# Altium PCB mega128PCB.PcbDoc (part 3 of 3)
Units mm, origin at the board's own origin, x right, y up, seen from the top; angles counter-clockwise.
Board outline 152.4 x 101.6 mm, 2 copper layers (Top Layer, Bottom Layer); 70 components, 96 nets, 393 pads, 80 vias.
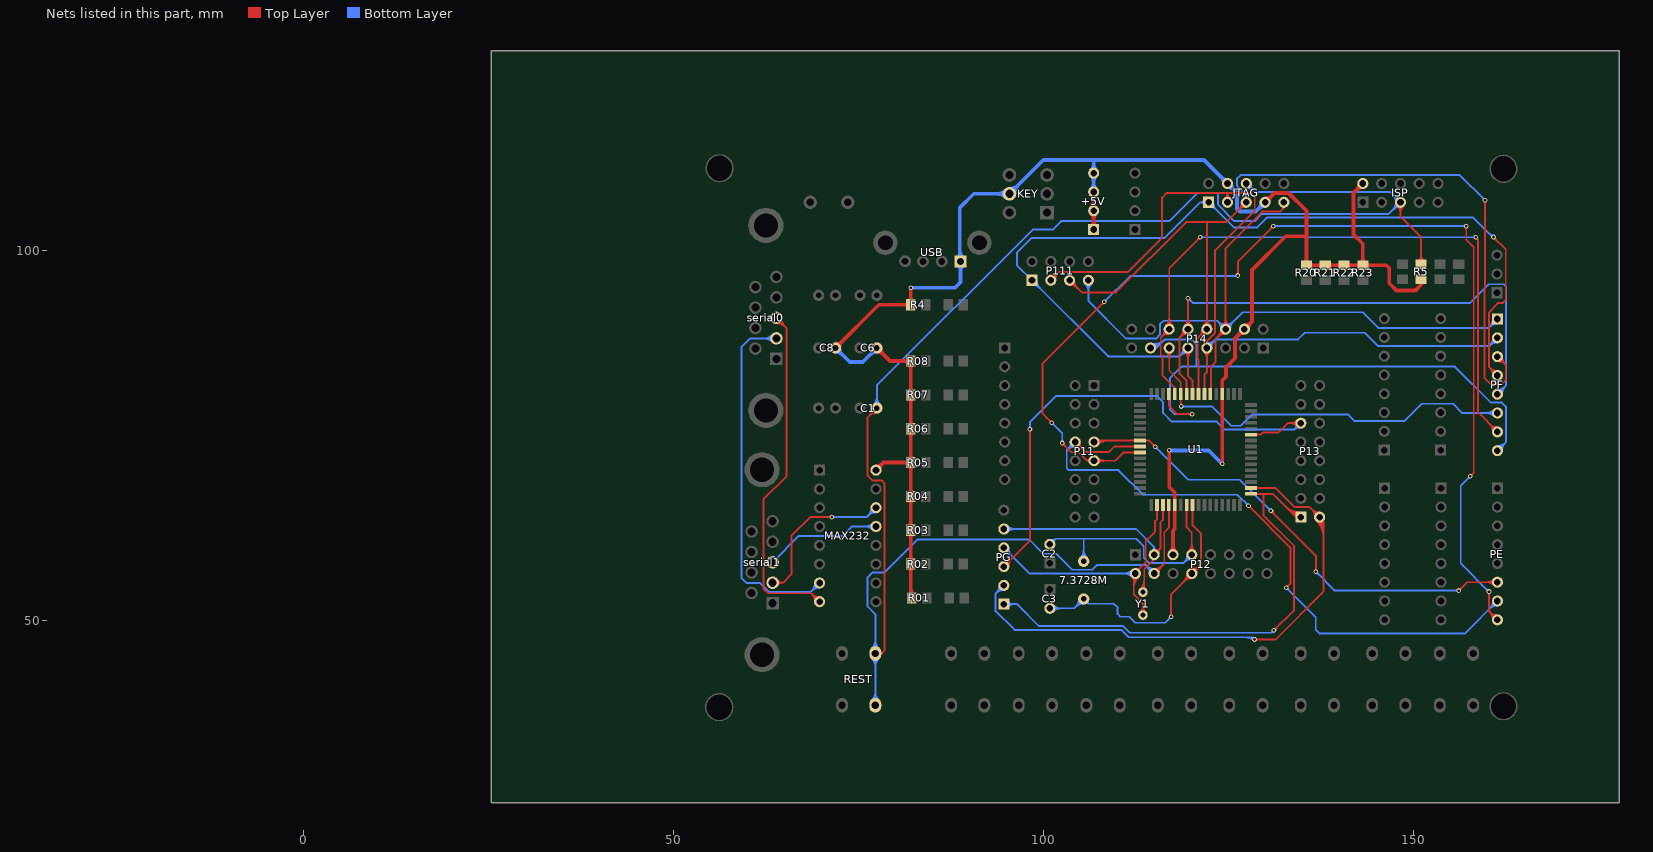
[diagram p3: the nets of this part, all layers, seen from the top]

## Via types
v1: diameter 0.635, hole 0.356, Top Layer to Bottom Layer, 80 vias

## Nets (pads, with @x,y where several pads share a name; then routed paths per layer and width w, separated by ;. In a path a pad name is that pad's centre, name@x,y a point inside that pad or via, vN(x,y) a via of type N, cw(c..) or ccw(c..) an arc to the next point about the centre after c; other vN are vias at no path point) (continued)
PE5: P11.7 PE.6 U1.7 | length 78.8
  Top Layer w0.254: P11.7@106.858,74.168 107.042,74.352 114.294,74.352 v1(115.113,73.533) ; P11.7@107.119,73.907 cw(c108.193,72.833) 108.193,74.352 ; P11.7@107.298,73.727 cw(c108.806,72.22) 108.806,74.352 ; P11.7@107.298,74.609 ccw(c107.918,75.228) 107.918,74.352 ; U1.7@112.437,74.265 ccw(c112.227,74.055) 112.227,74.352 ccw(c112.227,74.649) U1.7@112.437,74.439 ; U1.7@113.711,74.265 cw(c113.921,74.055) 113.921,74.352 cw(c113.921,74.649) U1.7@113.711,74.439 ; v1@114.922,73.533 ccw(c114.462,73.533) 114.788,73.858 ccw(c115.113,74.183) v1@115.113,73.724 ; v1@130.759,64.681 cw(c130.759,64.221) 131.084,64.546 cw(c131.41,64.872) v1@130.95,64.872 ; v1(130.759,64.872) 136.83,58.801 v1(136.83,56.617) ; v1@136.695,56.751 ccw(c136.37,57.077) 136.83,57.077 ccw(c137.29,57.077) v1@136.965,56.751 ; v1(156.14,54.083) 157.271,55.214 PE.6@161.364,55.214 ; v1@156.14,54.274 ccw(c156.14,54.733) 156.465,54.408 ccw(c156.791,54.083) v1@156.331,54.083 ; PE.6@160.923,54.773 ccw(c159.86,53.71) 159.86,55.214 ccw(c159.86,56.718) PE.6@160.923,55.655 ; PE.6@161.103,54.953 ccw(c160.473,54.323) 160.473,55.214 ccw(c160.473,56.105) PE.6@161.103,55.475
  Bottom Layer w0.254: v1@115.113,73.343 cw(c115.113,72.883) 115.438,73.208 cw(c115.763,73.533) v1@115.303,73.533 ; v1(115.113,73.533) 119.558,69.088 119.558,69.063 126.568,69.063 v1(130.759,64.872) ; v1@130.569,64.872 ccw(c130.109,64.872) 130.434,65.197 ccw(c130.759,65.522) v1@130.759,65.062 ; v1@136.83,56.426 cw(c136.83,55.905) 137.198,56.273 ; v1(136.83,56.617) 136.855,56.617 139.389,54.083 v1(156.14,54.083) ; v1@137.02,56.617 ccw(c137.419,56.617) 137.137,56.335 ; v1@156.005,53.948 ccw(c155.68,53.623) 155.68,54.083 ccw(c155.68,54.543) v1@156.005,54.218
PE6: P11.8 PE.7 U1.8 | length 102.5
  Top Layer w0.254: P11.8@104.318,73.545 cw(c104.318,72.041) 105.381,73.104 cw(c106.445,74.168) P11.8@104.941,74.168 ; P11.8@104.318,73.799 cw(c104.318,72.908) 104.948,73.538 cw(c105.578,74.168) P11.8@104.687,74.168 ; P11.8@104.318,74.168 105.664,72.822 108.89,72.822 109.62,73.552 U1.8@113.074,73.552 ; U1.8@112.437,73.465 ccw(c112.227,73.255) 112.227,73.552 ccw(c112.227,73.849) U1.8@112.437,73.639 ; v1@127.737,65.341 cw(c127.737,64.882) 128.062,65.207 cw(c128.387,65.532) v1@127.927,65.532 ; v1(127.737,65.532) 133.389,59.88 133.389,55.03 v1(132.842,54.483) ; v1@132.842,54.673 ccw(c132.842,55.133) 133.167,54.808 ccw(c133.492,54.483) v1@133.032,54.483
  Bottom Layer w0.254: P11.8@103.695,74.168 cw(c102.191,74.168) 103.254,73.104 cw(c104.318,72.041) P11.8@104.318,73.545 ; P11.8@103.949,74.168 cw(c103.058,74.168) 103.688,73.538 cw(c104.318,72.908) P11.8@104.318,73.799 ; P11.8@104.318,74.168 103.175,73.025 103.175,70.612 103.429,70.358 110.16,70.358 113.487,67.031 126.238,67.031 v1(127.737,65.532) ; v1@127.546,65.532 ccw(c127.086,65.532) 127.411,65.857 ccw(c127.737,66.182) v1@127.737,65.722 ; v1@132.842,54.292 cw(c132.842,53.833) 133.167,54.158 cw(c133.492,54.483) v1@133.032,54.483 ; v1(132.842,54.483) 136.819,50.506 136.819,48.779 137.338,48.26 156.95,48.26 PE.7@161.364,52.674 ; PE.7@160.741,52.674 cw(c159.237,52.674) 160.3,51.61 cw(c161.364,50.547) PE.7@161.364,52.051 ; PE.7@160.995,52.674 cw(c160.104,52.674) 160.734,52.044 cw(c161.364,51.414) PE.7@161.364,52.305
PE7: P11.9 PE.8 U1.9 | length 166.5
  Top Layer w0.254: v1@100.952,76.759 ccw(c100.492,76.759) 100.818,77.084 ccw(c101.143,77.409) v1@101.143,76.949 ; v1(101.143,76.759) 99.873,78.029 99.873,84.709 v1(108.255,93.091) ; v1@102.565,73.825 cw(c102.565,73.365) 102.89,73.69 cw(c103.216,74.016) v1@102.756,74.016 ; v1(102.565,74.016) 103.81,72.771 104.814,72.771 105.957,71.628 ; P11.9@106.275,71.408 ccw(c105.957,71.288) 105.957,71.628 ; P11.9@106.275,71.848 cw(c105.957,71.968) 105.957,71.628 ; P11.9@107.119,71.367 cw(c107.749,70.737) 107.749,71.628 cw(c107.749,72.519) P11.9@107.119,71.889 ; P11.9@107.298,71.187 cw(c108.362,70.124) 108.362,71.628 cw(c108.362,73.132) P11.9@107.298,72.069 ; v1@108.064,93.091 cw(c107.604,93.091) 107.93,92.766 cw(c108.255,92.441) v1@108.255,92.9 ; 110.479,72.379 110.479,72.381 ; U1.9@112.437,72.665 ccw(c112.227,72.455) 112.227,72.752 ccw(c112.227,73.049) U1.9@112.437,72.839 ; U1.9@113.074,72.752 110.852,72.752 109.728,71.628 P11.9@106.858,71.628 105.957,71.628 ; v1@126.154,96.782 ccw(c125.737,97.199) 126.327,97.199 ; v1(126.289,96.647) 126.327,96.685 126.327,98.59 v1(131.064,103.327) ; 126.327,97.015 ccw(c126.657,97.015) v1@126.424,96.782 ; v1@130.874,103.327 cw(c130.414,103.327) 130.739,103.002 cw(c131.064,102.677) v1@131.064,103.137 ; v1@157.015,103.192 cw(c156.69,102.867) 157.15,102.867 cw(c157.61,102.867) v1@157.285,103.192 ; v1(157.15,103.327) 157.15,101.498 158.166,100.482 158.166,70.002 v1(157.683,69.52) ; v1@157.683,69.71 ccw(c157.683,70.17) 158.008,69.845 ccw(c158.334,69.52) v1@157.874,69.52 ; v1@160.088,53.815 cw(c159.763,53.49) 160.223,53.49 cw(c160.683,53.49) v1@160.358,53.815 ; v1(160.223,53.95) 160.223,51.275 PE.8@161.364,50.134 ; PE.8@160.741,50.134 ccw(c159.237,50.134) 160.3,51.198 ccw(c161.364,52.261) PE.8@161.364,50.757 ; PE.8@160.995,50.134 ccw(c160.104,50.134) 160.734,50.764 ccw(c161.364,51.394) PE.8@161.364,50.503
  Bottom Layer w0.254: v1@101.143,76.568 cw(c101.143,76.108) 101.468,76.434 cw(c101.793,76.759) v1@101.333,76.759 ; v1(101.143,76.759) 102.565,75.336 v1(102.565,74.016) ; v1@102.43,74.15 ccw(c102.105,74.476) 102.565,74.476 ccw(c103.025,74.476) v1@102.7,74.15 ; v1(108.255,93.091) 111.684,96.52 111.684,96.571 126.213,96.571 v1(126.289,96.647) ; v1@108.255,93.281 ccw(c108.255,93.741) 108.58,93.416 ccw(c108.905,93.091) v1@108.445,93.091 ; 125.645,96.571 ccw(c125.645,97.291) v1@126.154,96.782 ; v1(131.064,103.327) v1(157.15,103.327) ; v1@131.199,103.192 cw(c131.524,102.867) 131.524,103.327 cw(c131.524,103.787) v1@131.199,103.462 ; v1@157.015,103.192 ccw(c156.69,102.867) 156.69,103.327 ccw(c156.69,103.787) v1@157.015,103.462 ; v1@157.493,69.52 cw(c157.033,69.52) 157.358,69.195 cw(c157.683,68.869) v1@157.683,69.329 ; v1(157.683,69.52) 156.413,68.25 156.413,57.76 v1(160.223,53.95) ; v1@160.033,53.95 ccw(c159.573,53.95) 159.898,54.275 ccw(c160.223,54.6) v1@160.223,54.14
PF0: P14.13 PF.8 U1.61 | length 89.7
  Top Layer w0.254: U1.61@116.887,80.015 cw(c116.677,79.805) 116.974,79.805 cw(c117.271,79.805) U1.61@117.061,80.015 ; U1.61@116.974,80.652 116.974,79.063 118.108,77.93 v1(120.117,77.93) ; v1@119.982,77.795 ccw(c119.657,77.47) 119.657,77.93 ccw(c119.657,78.39) v1@119.982,78.064
  Bottom Layer w0.254: P14.13@114.448,86.732 ccw(c114.68,87.793) 115.448,87.025 ; P14.13@114.478,86.868 115.291,86.868 ; P14.13@114.502,86.98 ccw(c114.798,88.332) 115.776,87.354 ; P14.13@114.557,87.228 ccw(c114.916,88.872) 116.105,87.682 ; P14.13@114.611,87.477 ccw(c115.033,89.411) 116.434,88.011 ; P14.13@115.079,86.706 cw(c115.291,86.649) 115.291,86.868 ; P14.13@115.079,87.03 ccw(c115.291,87.087) 115.291,86.868 ; v1@119.982,77.795 ccw(c119.657,77.47) 119.657,77.93 ccw(c119.657,78.39) v1@119.982,78.064 ; v1(120.117,77.93) 117.78,77.93 117.119,78.59 117.119,82.779 118.603,84.262 118.613,84.252 118.714,84.353 155.626,84.353 160.496,79.483 161.976,79.483 162.509,78.95 162.509,74.139 PF.8@161.364,72.994 ; 120.701,84.353 120.701,87.376 120.066,88.011 116.434,88.011 ; PF.8@161.364,73.363 ccw(c161.364,74.254) 161.994,73.624 ccw(c162.624,72.994) PF.8@161.733,72.994 ; PF.8@161.364,73.617 ccw(c161.364,75.121) 162.427,74.058 ccw(c163.491,72.994) PF.8@161.987,72.994 ; 115.291,86.868 116.434,88.011
PF1: P14.12 PF.7 U1.60 | length 103.5
  Top Layer w0.254: P14.12@116.395,89.408 cw(c114.891,89.408) 115.954,88.344 cw(c117.018,87.281) P14.12@117.018,88.785 ; P14.12@116.577,89.849 ccw(c115.514,90.912) 117.018,90.912 ccw(c118.522,90.912) P14.12@117.458,89.849 ; P14.12@116.649,89.408 cw(c115.758,89.408) 116.388,88.778 cw(c117.018,88.148) P14.12@117.018,89.039 ; P14.12@116.757,89.669 ccw(c116.127,90.299) 117.018,90.299 ccw(c117.909,90.299) P14.12@117.279,89.669 ; U1.60@117.689,81.291 ccw(c117.5,81.489) 117.774,81.489 ; U1.60@117.774,80.652 117.774,81.489 ; U1.60@117.859,81.291 cw(c118.048,81.489) 117.774,81.489 ; 120.84,101.485 cw(c121.209,101.117) v1@121.209,101.638 ; 120.902,101.547 ccw(c120.62,101.829) v1@121.018,101.829 ; v1(121.209,101.829) 121.183,101.829 117.018,97.663 P14.12@117.018,89.408 115.875,88.265 115.875,85.979 116.129,85.725 116.129,83.134 117.774,81.489 ; v1@158.42,101.638 cw(c158.42,101.178) 158.745,101.503 cw(c159.07,101.829) v1@158.61,101.829 ; v1(158.42,101.829) 158.75,101.498 158.75,78.148 PF.7@161.364,75.534 ; PF.7@160.741,75.534 ccw(c159.237,75.534) 160.3,76.598 ccw(c161.364,77.661) PF.7@161.364,76.157 ; PF.7@160.995,75.534 ccw(c160.104,75.534) 160.734,76.164 ccw(c161.364,76.794) PF.7@161.364,75.903
  Bottom Layer w0.254: v1(121.209,101.829) v1(158.42,101.829) ; v1@121.344,101.694 cw(c121.669,101.369) 121.669,101.829 cw(c121.669,102.289) v1@121.344,101.963 ; v1@158.285,101.694 ccw(c157.96,101.369) 157.96,101.829 ccw(c157.96,102.289) v1@158.285,101.963
PF2: P14.11 PF.6 U1.59 | length 64.6
  Top Layer w0.254: P14.11@116.577,86.427 cw(c115.514,85.364) 117.018,85.364 cw(c118.522,85.364) P14.11@117.458,86.427 ; P14.11@116.757,86.607 cw(c116.127,85.977) 117.018,85.977 cw(c117.909,85.977) P14.11@117.279,86.607 ; P14.11@117.018,86.868 117.018,83.82 118.574,82.264 U1.59@118.574,80.652 118.574,79.038 v1(118.643,78.969) ; U1.59@118.487,80.015 cw(c118.277,79.805) 118.574,79.805 cw(c118.871,79.805) U1.59@118.661,80.015 ; U1.59@118.487,81.289 ccw(c118.277,81.499) 118.574,81.499 ccw(c118.871,81.499) U1.59@118.661,81.289 ; 118.574,79.597 ccw(c119.271,79.597) v1@118.778,79.103
  Bottom Layer w0.254: v1(118.643,78.969) 122.758,78.969 125.374,76.352 126.695,76.352 128.194,77.851 141.224,77.851 142.088,76.987 148.794,76.987 151.137,79.33 155.366,79.33 156.622,78.074 PF.6@161.364,78.074 ; v1@118.778,78.834 cw(c119.103,78.509) 119.103,78.969 cw(c119.103,79.429) v1@118.778,79.103 ; PF.6@160.923,77.633 ccw(c159.86,76.57) 159.86,78.074 ccw(c159.86,79.578) PF.6@160.923,78.515 ; PF.6@161.103,77.813 ccw(c160.473,77.183) 160.473,78.074 ccw(c160.473,78.965) PF.6@161.103,78.335
PF3: P14.10 PF.5 U1.58 | length 86.5
  Top Layer w0.254: P14.10@118.935,89.408 cw(c117.431,89.408) 118.494,88.344 cw(c119.558,87.281) P14.10@119.558,88.785 ; P14.10@119.117,89.849 ccw(c118.054,90.912) 119.558,90.912 ccw(c121.062,90.912) P14.10@119.998,89.849 ; P14.10@119.189,89.408 cw(c118.298,89.408) 118.928,88.778 cw(c119.558,88.148) P14.10@119.558,89.039 ; U1.58@119.287,81.289 ccw(c119.077,81.499) 119.374,81.499 ccw(c119.671,81.499) U1.58@119.461,81.289 ; P14.10@119.297,89.669 ccw(c118.667,90.299) 119.558,90.299 ccw(c120.449,90.299) P14.10@119.819,89.669 ; U1.58@119.374,80.652 119.374,82.455 118.415,83.414 118.415,88.265 P14.10@119.558,89.408 v1(119.558,93.599) ; v1@119.423,93.464 cw(c119.098,93.139) 119.558,93.139 cw(c120.018,93.139) v1@119.693,93.464
  Bottom Layer w0.254: v1@119.558,93.408 cw(c119.558,92.949) 119.883,93.274 cw(c120.208,93.599) v1@119.748,93.599 ; v1(119.558,93.599) 120.208,92.949 157.668,92.949 160.198,95.479 162.23,95.479 162.509,95.199 162.509,81.759 PF.5@161.364,80.614 ; PF.5@161.364,80.983 ccw(c161.364,81.874) 161.994,81.244 ccw(c162.624,80.614) PF.5@161.733,80.614 ; PF.5@161.364,81.237 ccw(c161.364,82.741) 162.427,81.678 ccw(c163.491,80.614) PF.5@161.987,80.614
PF4: JTAG.1 P14.9 P111.1 PF.4 U1.57 | length 150.4
  Top Layer w0.254: P14.9@119.117,86.427 cw(c118.054,85.364) 119.558,85.364 cw(c121.062,85.364) P14.9@119.998,86.427 ; P14.9@119.297,86.607 cw(c118.667,85.977) 119.558,85.977 cw(c120.449,85.977) P14.9@119.819,86.607 ; P14.9@119.558,86.868 119.558,83.039 120.174,82.423 U1.57@120.174,80.652 ; U1.57@120.087,81.289 ccw(c119.877,81.499) 120.174,81.499 ccw(c120.471,81.499) U1.57@120.261,81.289 ; PF.4@160.741,83.154 ccw(c159.237,83.154) 160.3,84.218 ccw(c161.364,85.281) PF.4@161.364,83.777 ; v1@160.833,101.663 cw(c160.833,101.204) 161.158,101.529 cw(c161.483,101.854) v1@161.023,101.854 ; v1(160.833,101.854) 162.484,100.203 162.484,93.345 162.103,92.964 161.503,92.964 160.233,91.694 160.223,91.694 160.223,84.295 PF.4@161.364,83.154 ; PF.4@160.995,83.154 ccw(c160.104,83.154) 160.734,83.784 ccw(c161.364,84.414) PF.4@161.364,83.523
  Bottom Layer w0.254: P111.1@98.476,95.389 cw(c98.476,93.885) 99.539,94.948 cw(c100.603,96.012) P111.1@99.099,96.012 ; P111.1@98.476,95.643 cw(c98.476,94.752) 99.106,95.382 cw(c99.736,96.012) P111.1@98.845,96.012 ; P14.9@118.935,86.868 cw(c117.431,86.868) 118.494,85.804 cw(c119.558,84.741) P14.9@119.558,86.245 ; P14.9@119.189,86.868 cw(c118.298,86.868) 118.928,86.238 cw(c119.558,85.608) P14.9@119.558,86.499 ; P14.9@119.558,86.868 118.415,85.725 108.763,85.725 P111.1@98.476,96.012 96.444,98.044 96.444,99.746 98.437,101.739 116.385,101.739 121.199,106.553 ; JTAG.1@121.831,106.212 ccw(c121.199,105.799) 121.199,106.553 ; JTAG.1@121.831,106.894 cw(c121.199,107.307) 121.199,106.553 ; JTAG.1@122.352,105.93 cw(c122.352,104.426) 123.415,105.489 cw(c124.479,106.553) JTAG.1@122.975,106.553 ; JTAG.1@122.352,106.184 cw(c122.352,105.293) 122.982,105.923 cw(c123.612,106.553) JTAG.1@122.721,106.553 ; 160.291,102.269 ccw(c160.833,102.811) v1@160.833,102.044 ; v1(160.833,101.854) 160.706,101.854 158.09,104.47 130.195,104.47 129.877,104.152 129.857,104.152 128.829,103.124 125.781,103.124 JTAG.1@122.352,106.553 121.199,106.553
PF5: JTAG.5 P14.8 P111.5 PF.3 U1.56 | length 145
  Top Layer w0.254: P111.5@103.556,95.389 cw(c103.556,93.885) 104.619,94.948 cw(c105.683,96.012) P111.5@104.179,96.012 ; P111.5@103.556,95.643 cw(c103.556,94.752) 104.186,95.382 cw(c104.816,96.012) P111.5@103.925,96.012 ; P111.5@103.556,96.012 105.195,94.373 109.817,94.373 119.304,103.86 119.304,103.911 124.79,103.911 JTAG.5@127.432,106.553 ; U1.56@120.887,81.289 ccw(c120.677,81.499) 120.974,81.499 ccw(c121.271,81.499) U1.56@121.061,81.289 ; U1.56@120.974,80.652 120.974,85.217 120.84,85.351 120.84,88.15 P14.8@122.098,89.408 122.098,103.911 ; P14.8@121.475,89.408 cw(c119.971,89.408) 121.034,88.344 cw(c122.098,87.281) P14.8@122.098,88.785 ; P14.8@121.657,89.849 ccw(c120.594,90.912) 122.098,90.912 ccw(c123.602,90.912) P14.8@122.538,89.849 ; P14.8@121.729,89.408 cw(c120.838,89.408) 121.468,88.778 cw(c122.098,88.148) P14.8@122.098,89.039 ; P14.8@121.837,89.669 ccw(c121.207,90.299) 122.098,90.299 ccw(c122.989,90.299) P14.8@122.359,89.669 ; JTAG.5@126.809,106.553 cw(c125.305,106.553) 126.368,105.489 cw(c127.432,104.426) JTAG.5@127.432,105.93 ; JTAG.5@127.063,106.553 cw(c126.172,106.553) 126.802,105.923 cw(c127.432,105.293) JTAG.5@127.432,106.184 ; v1@159.555,106.673 cw(c159.229,106.348) 159.689,106.347 cw(c160.149,106.346) v1@159.824,106.672 ; v1(159.69,106.807) 159.639,82.804 160.426,82.017 161.976,82.017 162.495,82.536 162.495,84.563 PF.3@161.364,85.694 ; PF.3@161.364,85.071 cw(c161.364,83.567) 162.427,84.63 cw(c163.491,85.694) PF.3@161.987,85.694 ; PF.3@161.364,85.325 cw(c161.364,84.434) 161.994,85.064 cw(c162.624,85.694) PF.3@161.733,85.694
  Bottom Layer w0.254: JTAG.5@127.189,107.127 ccw(c127.033,107.493) 127.432,107.493 ; JTAG.5@127.432,106.553 127.432,107.494 ; JTAG.5@127.675,107.127 cw(c127.83,107.493) 127.432,107.493 ; v1@159.499,106.807 ccw(c159.039,106.807) 159.365,107.132 ccw(c159.69,107.457) v1@159.69,106.998 ; v1(159.69,106.807) 156.261,110.236 126.67,110.236 126.162,109.728 126.162,108.764 127.432,107.494
PF6: JTAG.3 P14.7 P111.3 PF.2 U1.55 | length 127
  Top Layer w0.254: P111.3@101.016,96.012 102.147,97.143 111.469,97.143 116.065,101.739 116.065,107.188 116.7,107.823 127.94,107.823 128.575,107.188 128.575,105.41 123.229,100.064 123.229,88.9 122.098,87.769 ; P111.3@101.016,96.381 ccw(c101.016,97.272) 101.646,96.642 ccw(c102.276,96.012) P111.3@101.385,96.012 ; P111.3@101.016,96.635 ccw(c101.016,98.139) 102.079,97.076 ccw(c103.143,96.012) P111.3@101.639,96.012 ; P14.7@121.657,86.427 cw(c120.594,85.364) 122.098,85.364 cw(c123.602,85.364) P14.7@122.538,86.427 ; U1.55@121.687,81.289 ccw(c121.477,81.499) 121.774,81.499 ccw(c122.071,81.499) U1.55@121.861,81.289 ; U1.55@121.774,80.652 121.774,83.236 122.098,83.56 P14.7@122.098,86.868 122.098,87.769 ; P14.7@121.837,86.607 cw(c121.207,85.977) 122.098,85.977 cw(c122.989,85.977) P14.7@122.359,86.607 ; P14.7@121.878,87.451 ccw(c121.758,87.769) 122.098,87.769 ; P14.7@122.318,87.451 cw(c122.438,87.769) 122.098,87.769 ; JTAG.3@124.511,107.046 ccw(c123.909,107.823) 124.892,107.823 ; JTAG.3@124.666,106.845 ccw(c124.31,107.305) 124.892,107.305 ccw(c125.474,107.305) JTAG.3@125.118,106.845 ; JTAG.3@124.892,106.553 124.892,107.823 ; JTAG.3@125.273,107.046 cw(c125.875,107.823) 124.892,107.823
  Bottom Layer w0.254: P14.7@122.098,86.868 123.241,88.011 134.417,88.011 135.331,88.925 143.434,88.925 145.212,87.147 160.277,87.147 PF.2@161.364,88.234 ; P14.7@122.098,87.237 ccw(c122.098,88.128) 122.728,87.498 ccw(c123.358,86.868) P14.7@122.467,86.868 ; P14.7@122.098,87.491 ccw(c122.098,88.995) 123.161,87.932 ccw(c124.225,86.868) P14.7@122.721,86.868 ; PF.2@160.741,88.234 cw(c159.237,88.234) 160.3,87.17 cw(c161.364,86.107) PF.2@161.364,87.611 ; PF.2@160.995,88.234 cw(c160.104,88.234) 160.734,87.604 cw(c161.364,86.974) PF.2@161.364,87.865
PF7: JTAG.9 P14.6 P111.7 PF.1 U1.54 | length 119.8
  Top Layer w0.254: U1.54@122.487,81.289 ccw(c122.016,81.76) 122.682,81.76 ; U1.54@122.574,80.652 122.682,80.76 122.682,84.379 123.266,84.963 123.266,88.036 P14.6@124.638,89.408 124.638,100.33 129.54,105.232 129.54,105.283 132.004,105.283 132.512,105.791 ; P14.6@124.015,89.408 cw(c122.511,89.408) 123.574,88.344 cw(c124.638,87.281) P14.6@124.638,88.785 ; P14.6@124.197,89.849 ccw(c123.134,90.912) 124.638,90.912 ccw(c126.142,90.912) P14.6@125.078,89.849 ; P14.6@124.269,89.408 cw(c123.378,89.408) 124.008,88.778 cw(c124.638,88.148) P14.6@124.638,89.039 ; P14.6@124.377,89.669 ccw(c123.747,90.299) 124.638,90.299 ccw(c125.529,90.299) P14.6@124.899,89.669 ; JTAG.9@132.388,105.942 cw(c132.357,105.791) 132.512,105.791 ; JTAG.9@132.512,106.553 132.512,105.791 ; JTAG.9@132.636,105.942 ccw(c132.666,105.791) 132.512,105.791
  Bottom Layer w0.254: P111.7@105.655,95.571 cw(c104.592,94.508) 106.096,94.508 cw(c107.6,94.508) P111.7@106.536,95.571 ; P111.7@105.835,95.751 cw(c105.205,95.121) 106.096,95.121 cw(c106.987,95.121) P111.7@106.357,95.751 ; P111.7@106.096,96.012 106.096,93.218 111.176,88.138 115.24,88.138 115.748,88.646 115.748,90.043 116.256,90.551 123.495,90.551 P14.6@124.638,89.408 126.924,91.694 143.188,91.694 145.322,89.56 160.15,89.56 PF.1@161.364,90.774 ; P14.6@124.015,89.408 ccw(c122.511,89.408) 123.574,90.472 ccw(c124.638,91.535) 124.638,90.031 ccw(c124.638,91.535) 125.701,90.472 ccw(c126.765,89.408) P14.6@125.261,89.408 ; P14.6@124.269,89.408 ccw(c123.378,89.408) 124.008,90.038 ccw(c124.638,90.668) 124.638,89.777 ccw(c124.638,90.668) 125.268,90.038 ccw(c125.898,89.408) P14.6@125.007,89.408 ; PF.1@160.741,90.774 cw(c159.237,90.774) 160.3,89.71 cw(c161.364,88.647) PF.1@161.364,90.151 ; PF.1@160.995,90.774 cw(c160.104,90.774) 160.734,90.144 cw(c161.364,89.514) PF.1@161.364,90.405
PG0: P13.1 PG.1 U1.33 | length 79.9
  Top Layer w0.254: U1.33@128.074,67.152 131.019,67.152 134.163,64.008 P13.1@134.798,64.008 ; U1.33@128.711,67.065 cw(c128.921,66.855) 128.921,67.152 cw(c128.921,67.449) U1.33@128.711,67.239 ; 129.718,67.152 129.743,67.127 129.743,64.262 133.897,60.108 133.897,51.448 v1(131.166,48.717) ; v1@131.166,48.908 ccw(c131.166,49.368) 131.491,49.042 ccw(c131.816,48.717) v1@131.356,48.717 ; 132.65,65.521 ccw(c134.798,67.668) P13.1@134.798,64.631 ; 133.084,65.087 ccw(c134.798,66.801) P13.1@134.798,64.377 ; 133.517,64.653 ccw(c134.798,65.934) P13.1@134.798,64.123 ; 133.951,64.22 ccw(c134.798,65.066) P13.1@134.798,63.869
  Bottom Layer w0.254: PG.1@94.676,52.245 96.451,52.245 99.42,49.276 110.801,49.276 111.686,48.391 130.84,48.391 v1(131.166,48.717) ; PG.1@94.937,51.984 cw(c95.567,51.354) 95.567,52.245 cw(c95.567,53.136) PG.1@94.937,52.506 ; PG.1@95.116,51.804 cw(c96.18,50.741) 96.18,52.245 cw(c96.18,53.749) PG.1@95.116,52.686 ; v1@130.975,48.717 cw(c130.515,48.717) 130.84,48.392 cw(c131.166,48.067) v1@131.166,48.527
PG1: P13.2 PG.2 U1.34 | length 92.2
  Top Layer w0.254: U1.34@128.074,67.952 131.356,67.952 133.929,65.38 135.966,65.38 137.846,63.5 137.846,53.924 131.394,47.473 v1(128.549,47.473) ; v1@128.684,47.338 cw(c129.009,47.013) 129.009,47.473 cw(c129.009,47.933) v1@128.684,47.607 ; U1.34@128.711,67.865 cw(c128.921,67.655) 128.921,67.952 cw(c128.921,68.249) U1.34@128.711,68.039 ; P13.2@136.715,64.008 ccw(c135.211,64.008) 136.274,65.072 ccw(c137.338,66.135) P13.2@137.338,64.631 ; P13.2@136.897,63.567 cw(c134.607,61.278) 137.846,61.278 ; P13.2@136.969,64.008 ccw(c136.078,64.008) 136.708,64.638 ccw(c137.338,65.268) P13.2@137.338,64.377 ; P13.2@137.077,63.747 cw(c135.221,61.891) 137.846,61.891 ; P13.2@137.256,63.927 cw(c135.834,62.504) 137.846,62.504 ; P13.2@137.436,64.106 cw(c136.447,63.117) 137.846,63.117
  Bottom Layer w0.254: PG.2@94.053,54.785 cw(c92.549,54.785) 93.612,53.721 cw(c94.676,52.658) PG.2@94.676,54.162 ; PG.2@94.307,54.785 cw(c93.416,54.785) 94.046,54.155 cw(c94.676,53.525) PG.2@94.676,54.416 ; PG.2@94.676,54.785 93.523,53.632 93.523,51.359 96.114,48.768 110.535,48.768 111.526,47.777 128.245,47.777 ; 127.354,47.777 cw(c127.354,46.277) v1@128.415,47.338 ; 127.967,47.777 cw(c127.967,46.89) v1@128.594,47.518 ; v1@128.359,47.482 ccw(c127.967,47.5) 128.245,47.777 ; v1@128.54,47.663 cw(c128.522,48.055) 128.245,47.777 ; v1(128.549,47.473) 128.245,47.777
PG2: P13.11 PG.3 U1.43 | length 80.6
  Top Layer w0.254: PG.3@94.676,57.325 98.196,60.846 v1(98.196,75.895) ; PG.3@94.676,57.694 ccw(c94.676,58.585) 95.306,57.955 ccw(c95.936,57.325) PG.3@95.045,57.325 ; PG.3@94.676,57.948 ccw(c94.676,59.452) 95.739,58.389 ccw(c96.803,57.325) PG.3@95.299,57.325 ; v1@98.062,75.76 cw(c97.736,75.435) 98.196,75.435 cw(c98.656,75.435) v1@98.331,75.76 ; U1.43@128.074,75.152 129.388,75.152 129.68,75.444 131.79,75.444 133.054,76.708 P13.11@134.798,76.708 ; U1.43@128.711,75.065 cw(c128.921,74.855) 128.921,75.152 cw(c128.921,75.449) U1.43@128.711,75.239 ; P13.11@134.357,76.267 ccw(c133.294,75.204) 133.294,76.708 ccw(c133.294,78.212) P13.11@134.357,77.149 ; P13.11@134.537,76.447 ccw(c133.907,75.817) 133.907,76.708 ccw(c133.907,77.599) P13.11@134.537,76.969
  Bottom Layer w0.254: v1@98.062,76.03 ccw(c97.736,76.355) 98.196,76.355 ccw(c98.656,76.355) v1@98.331,76.03 ; v1(98.196,75.895) 98.196,76.844 101.743,80.391 115.316,80.391 116.18,79.527 116.18,78.08 117.348,76.911 123.444,76.911 124.511,75.844 133.934,75.844 ; P13.11@134.183,76.61 cw(c133.308,76.471) 133.934,75.844 ; P13.11@134.7,76.093 ccw(c134.56,75.218) 133.934,75.844 ; P13.11@134.798,76.708 133.934,75.844
PG3: P12.2 PG.4 U1.18 Y1.2 | length 50.3
  Top Layer w0.254: P12.2@112.005,55.947 cw(c111.494,55.436) 112.217,55.436 ; 112.217,54.332 cw(c114.502,54.332) P12.2@112.886,55.947 ; 112.217,54.945 cw(c113.889,54.945) P12.2@112.707,56.127 ; 112.217,55.558 cw(c113.275,55.558) P12.2@112.527,56.307 ; P12.2@112.446,56.388 112.217,56.159 112.217,53.569 113.462,52.324 Y1.2@113.462,50.774 ; P12.2@112.446,56.497 113.843,57.894 113.843,60.757 115.113,62.027 115.113,63.468 115.374,63.729 U1.18@115.374,65.652 ; Y1.2@113.092,51.144 ccw(c112.199,52.037) 113.462,52.037 ccw(c114.724,52.037) Y1.2@113.832,51.144 ; U1.18@115.287,65.015 cw(c115.077,64.805) 115.374,64.805 cw(c115.671,64.805) U1.18@115.461,65.015
  Bottom Layer w0.254: PG.4@94.676,59.242 cw(c94.676,57.738) 95.739,58.801 cw(c96.803,59.865) PG.4@95.299,59.865 ; PG.4@94.676,59.496 cw(c94.676,58.605) 95.306,59.235 cw(c95.936,59.865) PG.4@95.045,59.865 ; PG.4@94.676,59.865 98.153,56.388 P12.2@112.446,56.388 ; P12.2@112.005,55.947 ccw(c110.942,54.884) 110.942,56.388 ccw(c110.942,57.892) P12.2@112.005,56.829 ; P12.2@112.185,56.127 ccw(c111.555,55.497) 111.555,56.388 ccw(c111.555,57.279) P12.2@112.185,56.649
PG4: P12.3 PG.5 U1.19 Y1.1 | length 45.2
  Top Layer w0.254: Y1.1@113.092,54.244 ccw(c111.77,55.566) 113.64,55.566 ; Y1.1@113.272,54.064 ccw(c112.383,54.953) 113.64,54.953 ; Y1.1@113.462,53.874 113.64,54.052 113.64,56.972 114.986,58.318 P12.3@114.986,58.928 115.83,59.772 ; 113.64,54.707 ccw(c114.295,54.707) Y1.1@113.832,54.244 ; P12.3@115.095,59.541 ccw(c115.242,60.36) 115.83,59.772 ; P12.3@115.599,59.038 cw(c116.417,59.184) 115.83,59.772 ; U1.19@116.087,65.015 cw(c115.877,64.805) 116.174,64.805 cw(c116.471,64.805) U1.19@116.261,65.015 ; U1.19@116.174,65.652 116.174,63.627 115.83,63.283 115.83,59.772
  Bottom Layer w0.254: PG.5@94.676,62.405 112.532,62.405 114.986,59.952 ; PG.5@94.937,62.144 cw(c95.567,61.514) 95.567,62.405 cw(c95.567,63.296) PG.5@94.937,62.666 ; PG.5@95.116,61.964 cw(c96.18,60.901) 96.18,62.405 cw(c96.18,63.909) PG.5@95.116,62.846 ; P12.3@114.7,59.481 ccw(c114.457,59.952) 114.986,59.952 ; P12.3@114.986,58.928 114.986,59.952 ; P12.3@115.272,59.481 cw(c115.515,59.952) 114.986,59.952
R1IN: MAX232.13 serial1.3 | length 19.7
  Bottom Layer w0.254: serial1.3@63.422,57.912 66.978,61.468 72.822,61.468 74.092,62.738 MAX232.13@77.394,62.738 ; MAX232.13@76.953,62.297 ccw(c75.89,61.234) 75.89,62.738 ccw(c75.89,64.242) MAX232.13@76.953,63.179 ; MAX232.13@77.133,62.477 ccw(c76.503,61.847) 76.503,62.738 ccw(c76.503,63.629) MAX232.13@77.133,62.999
R2IN: MAX232.8 serial0.3 | length 55
  Top Layer w0.254: serial0.3@63.93,90.214 cw(c63.93,88.481) 65.156,89.706 cw(c66.381,90.932) serial0.3@64.648,90.932 ; serial0.3@63.93,90.468 cw(c63.93,89.348) 64.722,90.14 cw(c65.514,90.932) serial0.3@64.394,90.932 ; serial0.3@63.93,90.932 65.278,89.584 65.278,69.494 62.179,66.396 62.179,54.356 62.814,53.721 68.631,53.721 MAX232.8@69.774,52.578 ; MAX232.8@69.151,52.578 ccw(c67.647,52.578) 68.71,53.642 ccw(c69.774,54.705) MAX232.8@69.774,53.201 ; MAX232.8@69.405,52.578 ccw(c68.514,52.578) 69.144,53.208 ccw(c69.774,53.838) MAX232.8@69.774,52.947
R\E\S\E\T: C1.1 ISP.5 JTAG.6 P12.4 R5.2 REST.2 U1.20 | length 272.6
  Top Layer w0.254: C1.1@76.886,78.74 cw(c75.353,78.74) 76.437,77.656 cw(c77.521,76.572) C1.1@77.521,78.105 ; C1.1@77.14,78.74 cw(c76.22,78.74) 76.87,78.09 cw(c77.521,77.439) C1.1@77.521,78.359 ; REST.2@77.307,45.585 77.307,45.568 78.156,45.568 ; C1.1@77.521,78.74 76.251,77.47 76.251,69.596 76.886,68.961 78.156,68.961 78.537,68.58 78.537,45.949 78.156,45.568 ; REST.2@77.958,45.415 cw(c78.156,45.363) 78.156,45.568 ; REST.2@77.966,45.722 ccw(c78.156,45.762) 78.156,45.568 ; P12.4@114.986,56.388 116.338,57.74 116.338,61.931 116.974,62.567 U1.20@116.974,65.652 ; P12.4@114.986,56.757 ccw(c114.986,57.648) 115.616,57.018 ccw(c116.246,56.388) P12.4@115.355,56.388 ; P12.4@114.986,57.011 ccw(c114.986,58.515) 116.049,57.452 ccw(c117.113,56.388) P12.4@115.609,56.388 ; U1.20@116.887,65.015 cw(c116.677,64.805) 116.974,64.805 cw(c117.271,64.805) U1.20@117.061,65.015 ; ISP.5@147.819,106.112 cw(c146.756,105.049) 148.26,105.049 cw(c149.764,105.049) ISP.5@148.7,106.112 ; ISP.5@147.999,106.292 cw(c147.369,105.662) 148.26,105.662 cw(c149.151,105.662) ISP.5@148.521,106.292 ; ISP.5@148.26,106.553 148.26,104.648 151.054,101.854 R5.2@151.054,98.171 ; R5.2@150.684,98.541 ccw(c149.791,99.434) 151.054,99.434 ccw(c152.316,99.434) R5.2@151.424,98.541
  Bottom Layer w0.254: REST.2@76.831,39.261 ccw(c75.682,40.41) 77.307,40.41 ccw(c78.932,40.41) REST.2@77.783,39.261 ; REST.2@76.831,44.909 cw(c75.682,43.76) 77.307,43.76 cw(c78.932,43.76) REST.2@77.783,44.909 ; REST.2@76.831,46.261 ccw(c75.682,47.41) 77.307,47.41 ccw(c78.932,47.41) REST.2@77.783,46.261 ; REST.2@77.011,39.081 ccw(c76.295,39.797) 77.307,39.797 ccw(c78.319,39.797) REST.2@77.603,39.081 ; REST.2@77.011,45.089 cw(c76.295,44.373) 77.307,44.373 cw(c78.319,44.373) REST.2@77.603,45.089 ; REST.2@77.011,46.081 ccw(c76.295,46.797) 77.307,46.797 ccw(c78.319,46.797) REST.2@77.603,46.081 ; C1.1@77.072,79.189 ccw(c75.988,80.273) 77.521,80.273 ccw(c79.054,80.273) C1.1@77.97,79.189 ; C1.1@77.251,79.009 ccw(c76.601,79.66) 77.521,79.66 ccw(c78.441,79.66) C1.1@77.79,79.009 ; REST.2@77.307,38.585 REST.2@77.307,45.585 77.307,50.876 76.251,51.932 76.251,55.88 76.886,56.515 78.537,56.515 83.033,61.011 98.069,61.011 100.025,59.055 101.727,59.055 103.886,56.896 106.604,56.896 107.227,57.519 113.855,57.519 P12.4@114.986,56.388 ; C1.1@77.521,78.74 77.521,81.813 98.577,102.87 101.27,102.87 102.413,104.013 117.043,104.013 120.853,107.823 123.368,107.823 123.622,107.569 123.622,106.223 125.832,104.013 128.575,104.013 129.54,104.978 146.685,104.978 ISP.5@148.26,106.553 146.851,107.962 128.563,107.962 JTAG.6@127.432,109.093 ; P12.4@114.363,56.388 ccw(c112.859,56.388) 113.922,57.452 ccw(c114.986,58.515) P12.4@114.986,57.011 ; P12.4@114.617,56.388 ccw(c113.726,56.388) 114.356,57.018 ccw(c114.986,57.648) P12.4@114.986,56.757 ; JTAG.6@127.432,108.47 cw(c127.432,106.966) 128.495,108.029 cw(c129.559,109.093) JTAG.6@128.055,109.093 ; JTAG.6@127.432,108.724 cw(c127.432,107.833) 128.062,108.463 cw(c128.692,109.093) JTAG.6@127.801,109.093 ; ISP.5@148.26,105.93 ccw(c148.26,104.426) 147.196,105.489 ccw(c146.133,106.553) 147.637,106.553 ccw(c146.133,106.553) 147.196,107.617 ccw(c148.26,108.68) ISP.5@148.26,107.176 ; ISP.5@148.26,106.184 ccw(c148.26,105.293) 147.63,105.923 ccw(c147,106.553) 147.891,106.553 ccw(c147,106.553) 147.63,107.183 ccw(c148.26,107.813) ISP.5@148.26,106.922
T1OUT: MAX232.14 serial1.2 | length 29.7
  Top Layer w0.254: serial1.2@63.422,55.142 64.845,55.142 ; serial1.2@63.795,54.866 cw(c64.341,54.463) 64.341,55.142 cw(c64.341,55.821) serial1.2@63.795,55.418 ; serial1.2@63.999,54.715 cw(c64.845,54.091) 64.845,55.142 ; serial1.2@63.999,55.569 ccw(c64.845,56.193) 64.845,55.142 ; v1@71.29,63.873 ccw(c70.965,63.548) 70.965,64.008 ccw(c70.965,64.468) v1@71.29,64.143 ; v1(71.425,64.008) 68.504,64.008 65.964,61.468 65.964,56.261 64.845,55.142
  Bottom Layer w0.254: v1(71.425,64.008) 76.124,64.008 MAX232.14@77.394,65.278 ; v1@71.56,63.873 cw(c71.885,63.548) 71.885,64.008 cw(c71.885,64.468) v1@71.56,64.143 ; MAX232.14@76.771,65.278 cw(c75.267,65.278) 76.33,64.214 cw(c77.394,63.151) MAX232.14@77.394,64.655 ; MAX232.14@77.025,65.278 cw(c76.134,65.278) 76.764,64.648 cw(c77.394,64.018) MAX232.14@77.394,64.909
T2OUT: MAX232.7 serial0.2 | length 56.5
  Bottom Layer w0.254: serial0.2@63.422,87.654 ccw(c62.196,86.429) 62.196,88.162 ccw(c62.196,89.895) serial0.2@63.422,88.67 ; serial0.2@63.602,87.834 ccw(c62.81,87.042) 62.81,88.162 ccw(c62.81,89.282) serial0.2@63.602,88.49 ; serial0.2@63.93,88.162 60.376,88.162 59.233,87.019 59.233,55.753 59.868,55.118 61.697,55.118 62.916,53.899 68.555,53.899 MAX232.7@69.774,55.118 ; MAX232.7@69.151,55.118 cw(c67.647,55.118) 68.71,54.054 cw(c69.774,52.991) MAX232.7@69.774,54.495 ; MAX232.7@69.405,55.118 cw(c68.514,55.118) 69.144,54.488 cw(c69.774,53.858) MAX232.7@69.774,54.749
VCC: +5V.1 +5V.2 +5V.3 +5V.4 C6.1 C8.2 ISP.2 JTAG.4 JTAG.7 KEY.5 MAX232.16 P12.5 P14.4 R01.2 R02.2 R03.2 R04.2 R4.2 R5.1 R05.2 R06.2 R07.2 R08.2 R20.2 R21.2 R22.2 R23.2 U1.21 U1.52 USB.1 | length 333.5
  Top Layer w0.508: C8.2@71.933,86.868 77.775,92.71 R4.2@82.093,92.71 v1(82.093,94.996) ; C8.2@71.933,87.376 ccw(c71.933,88.602) 72.8,87.735 ccw(c73.667,86.868) C8.2@72.441,86.868 ; MAX232.16@77.394,70.358 78.41,71.374 R05.2@82.093,71.374 ; MAX232.16@77.394,70.854 ccw(c77.394,72.051) 78.241,71.205 ccw(c79.087,70.358) MAX232.16@77.89,70.358 ; C6.1@77.521,86.36 cw(c77.521,85.134) 78.388,86.001 cw(c79.255,86.868) C6.1@78.029,86.868 ; C6.1@77.521,86.868 79.299,85.09 R08.2@82.093,85.09 R07.2@82.093,80.518 R06.2@82.093,75.946 R05.2@82.093,71.374 ; R02.2@81.813,57.278 cw(c81.137,56.602) 82.093,56.602 cw(c83.049,56.602) R02.2@82.373,57.278 ; R02.2@81.813,58.038 ccw(c81.137,58.714) 82.093,58.714 ccw(c83.049,58.714) R02.2@82.373,58.038 ; R03.2@81.813,61.85 cw(c81.137,61.174) 82.093,61.174 cw(c83.049,61.174) R03.2@82.373,61.85 ; R03.2@81.813,62.61 ccw(c81.137,63.286) 82.093,63.286 ccw(c83.049,63.286) R03.2@82.373,62.61 ; R04.2@81.813,66.422 cw(c81.137,65.746) 82.093,65.746 cw(c83.049,65.746) R04.2@82.373,66.422 ; R04.2@81.813,67.182 ccw(c81.137,67.858) 82.093,67.858 ccw(c83.049,67.858) R04.2@82.373,67.182 ; R05.2@81.813,70.994 cw(c81.137,70.318) 82.093,70.318 cw(c83.049,70.318) R05.2@82.373,70.994 ; R05.2@81.813,71.094 ccw(c81.137,70.418) 81.137,71.374 ccw(c81.137,72.33) R05.2@81.813,71.654 ; R05.2@81.813,71.754 ccw(c81.137,72.43) 82.093,72.43 ccw(c83.049,72.43) R05.2@82.373,71.754 ; R06.2@81.813,75.566 cw(c81.137,74.89) 82.093,74.89 cw(c83.049,74.89) R06.2@82.373,75.566 ; R06.2@81.813,76.326 ccw(c81.137,77.002) 82.093,77.002 ccw(c83.049,77.002) R06.2@82.373,76.326 ; R07.2@81.813,80.138 cw(c81.137,79.462) 82.093,79.462 cw(c83.049,79.462) R07.2@82.373,80.138 ; R07.2@81.813,80.898 ccw(c81.137,81.574) 82.093,81.574 ccw(c83.049,81.574) R07.2@82.373,80.898 ; R08.2@81.813,84.71 cw(c81.137,84.034) 82.093,84.034 cw(c83.049,84.034) R08.2@82.373,84.71 ; R08.2@81.813,84.81 ccw(c81.137,84.134) 81.137,85.09 ccw(c81.137,86.046) R08.2@81.813,85.37 ; R4.2@81.813,92.43 ccw(c81.137,91.754) 81.137,92.71 ccw(c81.137,93.666) R4.2@81.813,92.99 ; R4.2@81.813,93.09 ccw(c81.137,93.766) 82.093,93.766 ccw(c83.049,93.766) R4.2@82.373,93.09 ; R01.2@81.94,53.466 ccw(c81.57,53.835) R01.2@82.093,53.835 ; 82.093,54.449 ccw(c83.482,54.449) R01.2@82.5,53.466 ; R01.2@82.22,53.086 82.093,53.213 R03.2@82.093,62.23 R04.2@82.093,66.802 R05.2@82.093,71.374 ; +5V.1@106.455,103.221 ccw(c105.608,104.067) 106.806,104.067 ccw(c108.003,104.067) +5V.1@107.157,103.221 ; +5V.2@106.455,105.059 cw(c105.608,104.213) 106.806,104.213 cw(c108.003,104.213) +5V.2@107.157,105.059 ; +5V.2@106.455,105.761 ccw(c105.608,106.607) 106.806,106.607 ccw(c108.003,106.607) +5V.2@107.157,105.761 ; +5V.3@106.455,107.599 cw(c105.608,106.753) 106.806,106.753 cw(c108.003,106.753) +5V.3@107.157,107.599 ; +5V.1@106.806,102.87 +5V.3@106.806,107.95 ; v1(117.018,73.025) 117.018,68.072 117.774,67.316 117.774,62.402 117.526,62.154 P12.5@117.526,58.928 ; P12.5@117.175,59.279 ccw(c116.328,60.125) 117.526,60.125 ccw(c118.723,60.125) P12.5@117.877,59.279 ; v1(124.174,71.203) U1.52@124.174,80.652 124.174,82.48 124.683,82.99 124.683,84.246 125.908,85.471 125.908,88.138 P14.4@127.178,89.408 128.219,90.449 128.219,97.409 132.771,101.961 135.54,101.961 135.56,101.981 ; P14.4@126.682,89.408 cw(c125.484,89.408) 126.331,88.561 cw(c127.178,87.715) P14.4@127.178,88.912 ; P14.4@127.178,89.904 ccw(c127.178,91.101) 128.025,90.255 ccw(c128.871,89.408) P14.4@127.674,89.408 ; JTAG.7@129.972,106.553 131.242,107.823 133.147,107.823 135.56,105.41 R20.2@135.56,98.044 R21.2@138.1,98.044 R22.2@140.64,98.044 R23.2@143.18,98.044 ; JTAG.7@129.972,107.049 ccw(c129.972,108.246) 130.819,107.4 ccw(c131.665,106.553) JTAG.7@130.468,106.553 ; R20.2@135.28,98.324 ccw(c134.604,99) 135.56,99 ccw(c136.516,99) R20.2@135.84,98.324 ; R20.2@135.94,97.764 cw(c136.616,97.088) 136.616,98.044 cw(c136.616,99) R20.2@135.94,98.324 ; R21.2@137.72,97.764 ccw(c137.044,97.088) 137.044,98.044 ccw(c137.044,99) R21.2@137.72,98.324 ; R21.2@138.48,97.764 cw(c139.156,97.088) 139.156,98.044 cw(c139.156,99) R21.2@138.48,98.324 ; R22.2@140.26,97.764 ccw(c139.584,97.088) 139.584,98.044 ccw(c139.584,99) R22.2@140.26,98.324 ; R22.2@141.02,97.764 cw(c141.696,97.088) 141.696,98.044 cw(c141.696,99) R22.2@141.02,98.324 ; ISP.2@142.684,109.093 cw(c141.486,109.093) 142.333,108.246 cw(c143.18,107.4) ISP.2@143.18,108.597 ; R23.2@142.8,97.764 ccw(c142.124,97.088) 142.124,98.044 ccw(c142.124,99) R23.2@142.8,98.324 ; R23.2@142.9,98.324 ccw(c142.224,99) 143.18,99 ccw(c144.136,99) R23.2@143.46,98.324 ; ISP.2@143.18,109.093 141.91,107.823 141.91,102.21 143.18,100.94 R23.2@143.18,98.044 ; R23.2@143.56,97.764 cw(c144.236,97.088) 144.236,98.044 cw(c144.236,99) R23.2@143.56,98.324 ; R5.1@150.833,95.81 cw(c150.555,95.396) 151.054,95.396 ; R5.1@151.054,96.139 151.054,95.396 ; R5.1@151.275,95.81 ccw(c151.553,95.396) 151.054,95.396 ; R23.2@143.18,98.044 146.355,98.044 146.736,97.663 146.736,95.609 147.711,94.634 150.292,94.634 151.054,95.396
  Bottom Layer w0.508: C8.2@71.933,86.36 cw(c71.933,85.134) 72.8,86.001 cw(c73.667,86.868) C8.2@72.441,86.868 ; C8.2@71.933,86.868 73.838,84.963 75.616,84.963 C6.1@77.521,86.868 ; C6.1@77.013,86.868 cw(c75.786,86.868) 76.654,86.001 cw(c77.521,85.134) C6.1@77.521,86.36 ; v1(82.093,94.996) 88.062,94.996 88.824,95.758 USB.1@88.824,98.552 88.697,98.679 88.697,105.791 90.602,107.696 KEY.5@95.428,107.696 100,112.268 121.717,112.268 126.174,107.811 126.174,105.664 126.543,105.295 128.714,105.295 JTAG.7@129.972,106.553 ; USB.1@88.438,98.166 cw(c87.506,97.234) 88.824,97.234 cw(c90.142,97.234) USB.1@89.21,98.166 ; USB.1@88.438,98.938 ccw(c87.812,99.564) 88.697,99.564 ; 88.697,100.177 ccw(c90.449,100.177) USB.1@89.21,98.938 ; KEY.5@94.953,107.222 ccw(c93.808,106.076) 93.808,107.696 ccw(c93.808,109.316) KEY.5@94.953,108.17 ; KEY.5@95.428,108.367 ccw(c95.428,109.987) 96.573,108.841 ccw(c97.719,107.696) KEY.5@96.099,107.696 ; +5V.3@106.455,108.301 ccw(c105.608,109.147) 106.806,109.147 ccw(c108.003,109.147) +5V.3@107.157,108.301 ; +5V.4@106.455,110.139 cw(c105.608,109.293) 106.806,109.293 cw(c108.003,109.293) +5V.4@107.157,110.139 ; +5V.4@106.455,110.841 ccw(c105.608,111.687) 106.806,111.687 ccw(c108.003,111.687) +5V.4@107.157,110.841 ; +5V.3@106.806,107.95 106.806,112.216 106.858,112.268 ; v1(117.018,73.025) 122.352,73.025 v1(124.174,71.203) ; JTAG.4@124.396,109.093 ccw(c123.198,109.093) 124.045,109.94 ccw(c124.892,110.786) JTAG.4@124.892,109.589 ; JTAG.4@124.892,108.597 cw(c124.892,107.4) 125.739,108.246 cw(c126.585,109.093) JTAG.4@125.388,109.093 ; JTAG.7@129.476,106.553 cw(c128.278,106.553) 129.125,105.706 cw(c129.972,104.86) JTAG.7@129.972,106.057
XTAL1: 7.3728M.1 C3.2 P12.8 U1.24 | length 54.3
  Top Layer w0.254: v1@117.137,50.681 ccw(c116.812,51.006) 117.272,51.006 ccw(c117.732,51.006) v1@117.407,50.681 ; v1(117.272,50.546) 117.272,53.594 P12.8@120.066,56.388 121.33,57.652 121.33,61.735 120.174,62.89 U1.24@120.174,65.652 ; P12.8@119.443,56.388 cw(c117.939,56.388) 119.002,55.324 cw(c120.066,54.261) P12.8@120.066,55.765 ; P12.8@119.697,56.388 cw(c118.806,56.388) 119.436,55.758 cw(c120.066,55.128) P12.8@120.066,56.019 ; P12.8@120.066,56.757 ccw(c120.066,57.648) 120.696,57.018 ccw(c121.326,56.388) P12.8@120.435,56.388 ; P12.8@120.066,57.011 ccw(c120.066,58.515) 121.129,57.452 ccw(c122.193,56.388) P12.8@120.689,56.388 ; U1.24@120.087,65.015 cw(c119.877,64.805) 120.174,64.805 cw(c120.471,64.805) U1.24@120.261,65.015
  Bottom Layer w0.254: C3.2@100.889,51.689 104.191,51.689 7.3728M.1@105.461,52.959 106.121,52.299 ; C3.2@101.15,51.428 cw(c101.78,50.798) 101.78,51.689 cw(c101.78,52.58) C3.2@101.15,51.95 ; C3.2@101.329,51.248 cw(c102.393,50.185) 102.393,51.689 cw(c102.393,53.193) C3.2@101.329,52.13 ; 7.3728M.1@104.826,52.959 cw(c103.293,52.959) 104.377,51.875 cw(c105.461,50.791) 7.3728M.1@105.461,52.324 ; 7.3728M.1@105.08,52.959 cw(c104.16,52.959) 104.81,52.309 cw(c105.461,51.658) 7.3728M.1@105.461,52.578 ; 7.3728M.1@105.713,52.376 cw(c105.86,52.038) 106.121,52.299 ; 7.3728M.1@106.043,52.707 ccw(c106.382,52.56) 106.121,52.299 ; 111.643,50.546 112.446,49.743 116.469,49.743 v1(117.272,50.546) ; 111.684,50.546 110.414,50.546 110.033,50.927 110.033,51.816 109.55,52.299 106.121,52.299 ; v1@117.081,50.546 cw(c116.621,50.546) 116.947,50.221 cw(c117.272,49.896) v1@117.272,50.355
XTAL2: 7.3728M.2 C2.2 P12.7 U1.23 | length 45.4
  Top Layer w0.254: U1.23@119.287,65.015 cw(c119.077,64.805) 119.374,64.805 cw(c119.671,64.805) U1.23@119.461,65.015 ; U1.23@119.374,65.652 119.374,62.617 120.066,61.925 P12.7@120.066,58.928 ; P12.7@119.625,59.369 ccw(c118.562,60.432) 120.066,60.432 ccw(c121.57,60.432) P12.7@120.506,59.369 ; P12.7@119.805,59.189 ccw(c119.175,59.819) 120.066,59.819 ccw(c120.957,59.819) P12.7@120.327,59.189
  Bottom Layer w0.254: C2.2@100.889,60.325 101.651,61.087 ; C2.2@101.051,60.927 ccw(c101.212,61.526) 101.651,61.087 ; C2.2@101.49,60.487 cw(c102.089,60.648) 101.651,61.087 ; 7.3728M.2@105.012,58.488 ccw(c103.928,59.572) 105.461,59.572 ccw(c106.994,59.572) 7.3728M.2@105.91,58.488 ; 7.3728M.2@105.191,58.308 ccw(c104.541,58.959) 105.461,58.959 ccw(c106.381,58.959) 7.3728M.2@105.73,58.308 ; 7.3728M.2@105.461,58.039 105.461,61.087 ; P12.7@119.443,58.928 cw(c117.939,58.928) 119.002,57.864 cw(c120.066,56.801) P12.7@120.066,58.305 ; P12.7@119.697,58.928 cw(c118.806,58.928) 119.436,58.298 cw(c120.066,57.668) P12.7@120.066,58.559 ; P12.7@120.066,58.928 118.923,57.785 114.327,57.785 113.577,58.535 113.577,60.083 112.573,61.087 101.651,61.087
pads on no net: ISP.3 JTAG.8 KEY.1 KEY.2 KEY.3 KEY.4 serial0.1 serial0.4 serial0.6 serial0.7 serial0.8 serial0.9 serial0.10 serial0.11 serial1.1 serial1.4 serial1.6 serial1.7 serial1.8 serial1.9 serial1.10 serial1.11 USB.2 USB.3 USB.5 USB.6

## Polygon pours and split planes (outlines as drawn)
no net on Top Layer (hatched 45Degree grid 0.508 track 0.203): 53.645,112.141 55.169,113.665 163.17,113.665 164.567,112.268 164.567,37.389 163.093,35.916 55.042,35.916 53.797,37.16 53.696,37.262 53.696,112.09
no net on Bottom Layer (hatched 45Degree grid 0.508 track 0.203): 53.746,112.243 55.169,113.665 163.17,113.665 164.567,112.268 164.567,37.363 163.119,35.916 55.042,35.916 53.746,37.211

## Keep-outs
Keep-Out Layer:
  lines w0.254: -31.115,118.872 -28.067,121.92 ; 53.213,37.008 54.915,35.331 ; 53.264,37.059 53.264,109.22 53.238,112.471 54.966,114.198 58.217,114.173 145.085,114.173 ; 54.686,35.433 163.347,35.433 ; 144.704,114.173 163.5,114.173 ; 163.373,35.433 165.049,37.135 ; 163.398,114.224 165.1,112.547 ; 165.024,37.186 165.075,112.624

## Silkscreen, mask and mechanical layers (free items; w line width, h text height)
Top Overlay:
  text "GND" at 163.5,98.679 h0.64 r90
  text "+5V" at 68.885,97.409 h1.52 r90
  text "GND" at 74.473,97.409 h1.52 r90
  text "AVCC" at 163.5,95.885 h0.64 r90
  text "AREF" at 163.627,93.091 h0.64 r90
  text "PC7" at 150.038,90.424 h0.76
  text "PA7" at 142.418,90.297 h0.76
  text "PF7" at 157.658,90.297 h0.76
  text "PC6" at 150.038,87.757 h0.76
  text "PA6" at 142.418,87.63 h0.76
  text "PF6" at 157.658,87.63 h0.76
  text "L7" at 91.491,86.36 h0.76
  text "PC5" at 150.038,85.344 h0.76
  text "PA5" at 142.418,85.217 h0.76
  text "PF5" at 157.658,85.217 h0.76
  text "L6" at 91.364,83.82 h0.76
  text "PC4" at 150.038,82.804 h0.76
  text "PA4" at 142.418,82.677 h0.76
  text "PF4" at 157.658,82.677 h0.76
  text "L5" at 91.491,81.407 h0.76
  text "PC3" at 150.038,80.264 h0.76
  text "PA3" at 142.418,80.137 h0.76
  text "PF3" at 157.658,80.137 h0.76
  text "L4" at 91.364,78.74 h0.76
  text "PC2" at 150.038,77.724 h0.76
  text "PA2" at 142.418,77.597 h0.76
  text "PF2" at 157.658,77.597 h0.76
  text "L3" at 91.364,76.2 h0.76
  text "PC1" at 150.038,75.184 h0.76
  text "PA1" at 142.418,75.057 h0.76
  text "PF1" at 157.658,75.057 h0.76
  text "L2" at 91.364,73.787 h0.76
  text "PC0" at 150.038,72.644 h0.76
  text "PA0" at 142.418,72.517 h0.76
  text "PF0" at 157.658,72.517 h0.76
  text "L1" at 91.364,71.247 h0.76
  text "L0" at 91.364,68.58 h0.76
  text "PB0" at 142.418,67.564 h0.76
  text "PD0" at 150.038,67.564 h0.76
  text "PE0" at 157.658,67.564 h0.76
  text "PB1" at 142.418,64.897 h0.76
  text "PD1" at 150.038,64.897 h0.76
  text "PE1" at 157.658,64.897 h0.76
  text "PEN" at 91.034,64.414 h0.76
  text "PB2" at 142.418,62.484 h0.76
  text "PD2" at 150.038,62.484 h0.76
  text "PE2" at 157.658,62.484 h0.76
  text "PG4" at 91.034,62.001 h0.76
  text "PB3" at 142.418,59.944 h0.76
  text "PD3" at 150.038,59.944 h0.76
  text "PE3" at 157.658,59.944 h0.76
  text "PG3" at 90.983,59.436 h0.76
  text "PB4" at 142.418,57.404 h0.76
  text "PD4" at 150.038,57.404 h0.76
  text "PE4" at 157.658,57.404 h0.76
  text "PG2" at 91.034,57.023 h0.76
  text "PB5" at 142.418,54.864 h0.76
  text "PD5" at 150.038,54.864 h0.76
  text "PE5" at 157.658,54.864 h0.76
  text "PG1" at 91.237,54.356 h0.76
  text "PB6" at 142.418,52.324 h0.76
  text "PD6" at 150.038,52.324 h0.76
  text "PE6" at 157.658,52.324 h0.76
  text "PG0" at 91.034,51.816 h0.76
  text "PB7" at 142.418,49.784 h0.76
  text "PD7" at 150.038,49.784 h0.76
  text "PE7" at 157.658,49.784 h0.76
  text "PD0~PD7" at 83.998,37.846 h1.27 r90

## Text inside footprints (layer, text, board x,y; h text height)
ISP: Top Overlay "2" at 140.64,108.585 h1.27; Top Overlay "1" at 141.148,106.045 h1.27; Top Overlay "9" at 154.864,106.045 h1.27; Top Overlay "10" at 154.864,108.585 h1.27
JTAG: Top Overlay "2" at 119.812,108.585 h1.27; Top Overlay "1" at 120.32,106.045 h1.27; Top Overlay "9" at 134.036,106.045 h1.27; Top Overlay "10" at 134.036,108.585 h1.27
P11: Top Overlay "16" at 103.683,61.595 h0.64; Top Overlay "15" at 106.35,61.595 h0.64; Top Overlay "1" at 106.731,83.439 h0.64; Top Overlay "2" at 103.937,83.439 h0.64
P12: Top Overlay "32" at 131.75,55.753 h0.64; Top Overlay "31" at 131.877,58.547 h0.64; Top Overlay "17" at 109.779,58.42 h0.64; Top Overlay "18" at 109.779,56.007 h0.64
P13: Top Overlay "48" at 136.703,83.439 h0.64; Top Overlay "47" at 134.29,83.439 h0.64; Top Overlay "33" at 134.163,62.23 h0.64 r180; Top Overlay "34" at 136.957,61.468 h0.64
P14: Top Overlay "64" at 109.017,89.027 h0.64; Top Overlay "63" at 109.017,86.36 h0.64; Top Overlay "49" at 131.115,86.487 h0.64; Top Overlay "50" at 131.369,89.027 h0.64
P111: Top Overlay "2" at 96.19,98.044 h0.64; Top Overlay "1" at 96.317,95.631 h0.64; Top Overlay "7" at 107.62,95.504 h0.64; Top Overlay "8" at 107.62,98.044 h0.64
serial0: Top Overlay "6" at 57.985,86.277 h1.5 r90; Top Overlay "9" at 57.985,94.587 h1.5 r90; Top Overlay "5" at 64.694,98.298 h1.5 r90; Top Overlay "1" at 64.694,83.185 h1.5 r90
serial1: Top Overlay "6" at 57.477,53.257 h1.5 r90; Top Overlay "9" at 57.477,61.567 h1.5 r90; Top Overlay "5" at 64.186,65.278 h1.5 r90; Top Overlay "1" at 64.186,50.165 h1.5 r90